# Altium PCB Hot_Water_Dispensar.PcbDoc
Units mil, origin at the board's own origin, x right, y up, seen from the top; angles counter-clockwise.
Board outline 5905.51 x 7480.32 mil, 2 copper layers (Top Layer, Bottom Layer); 38 components, 25 nets, 170 pads, 8 vias.
Unrouted connection lines stored in the file: 4.
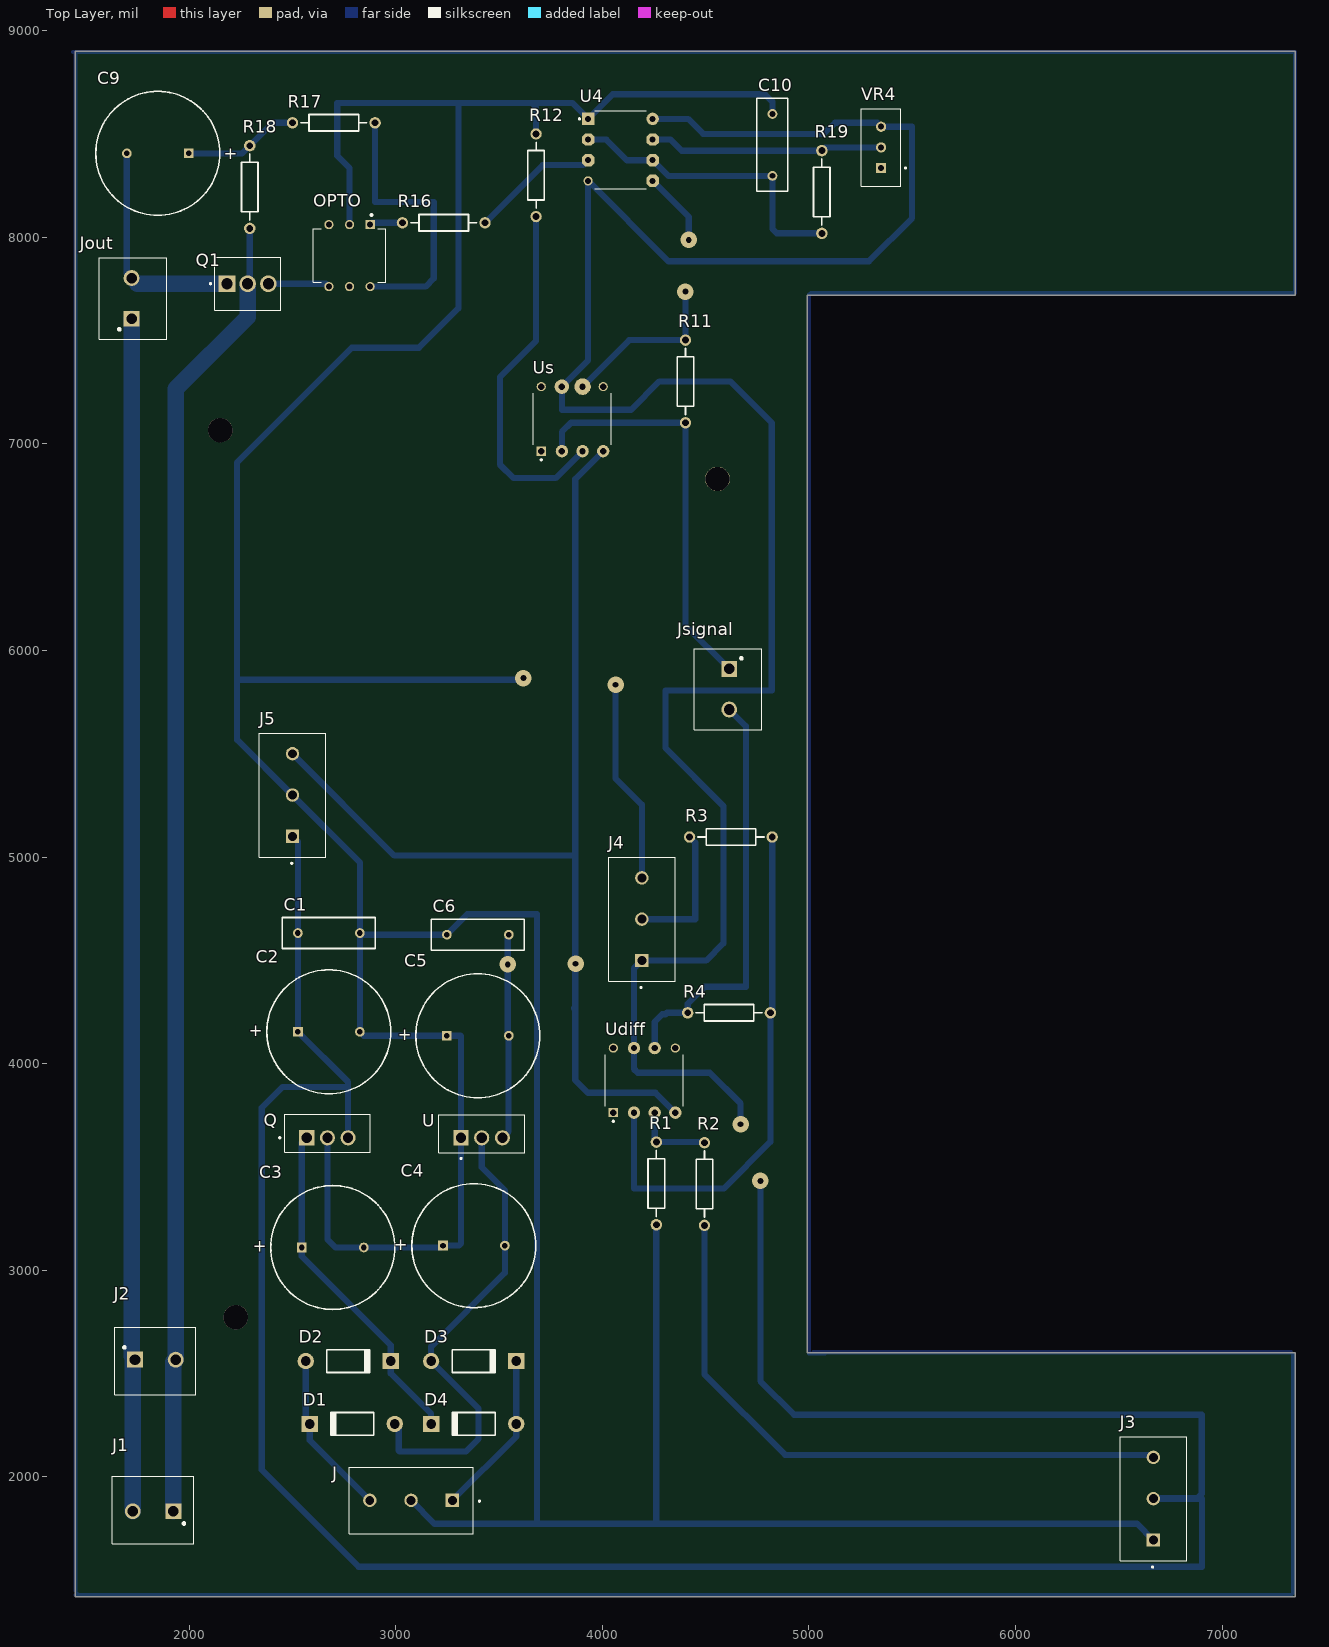
[diagram p0: Top Layer view]
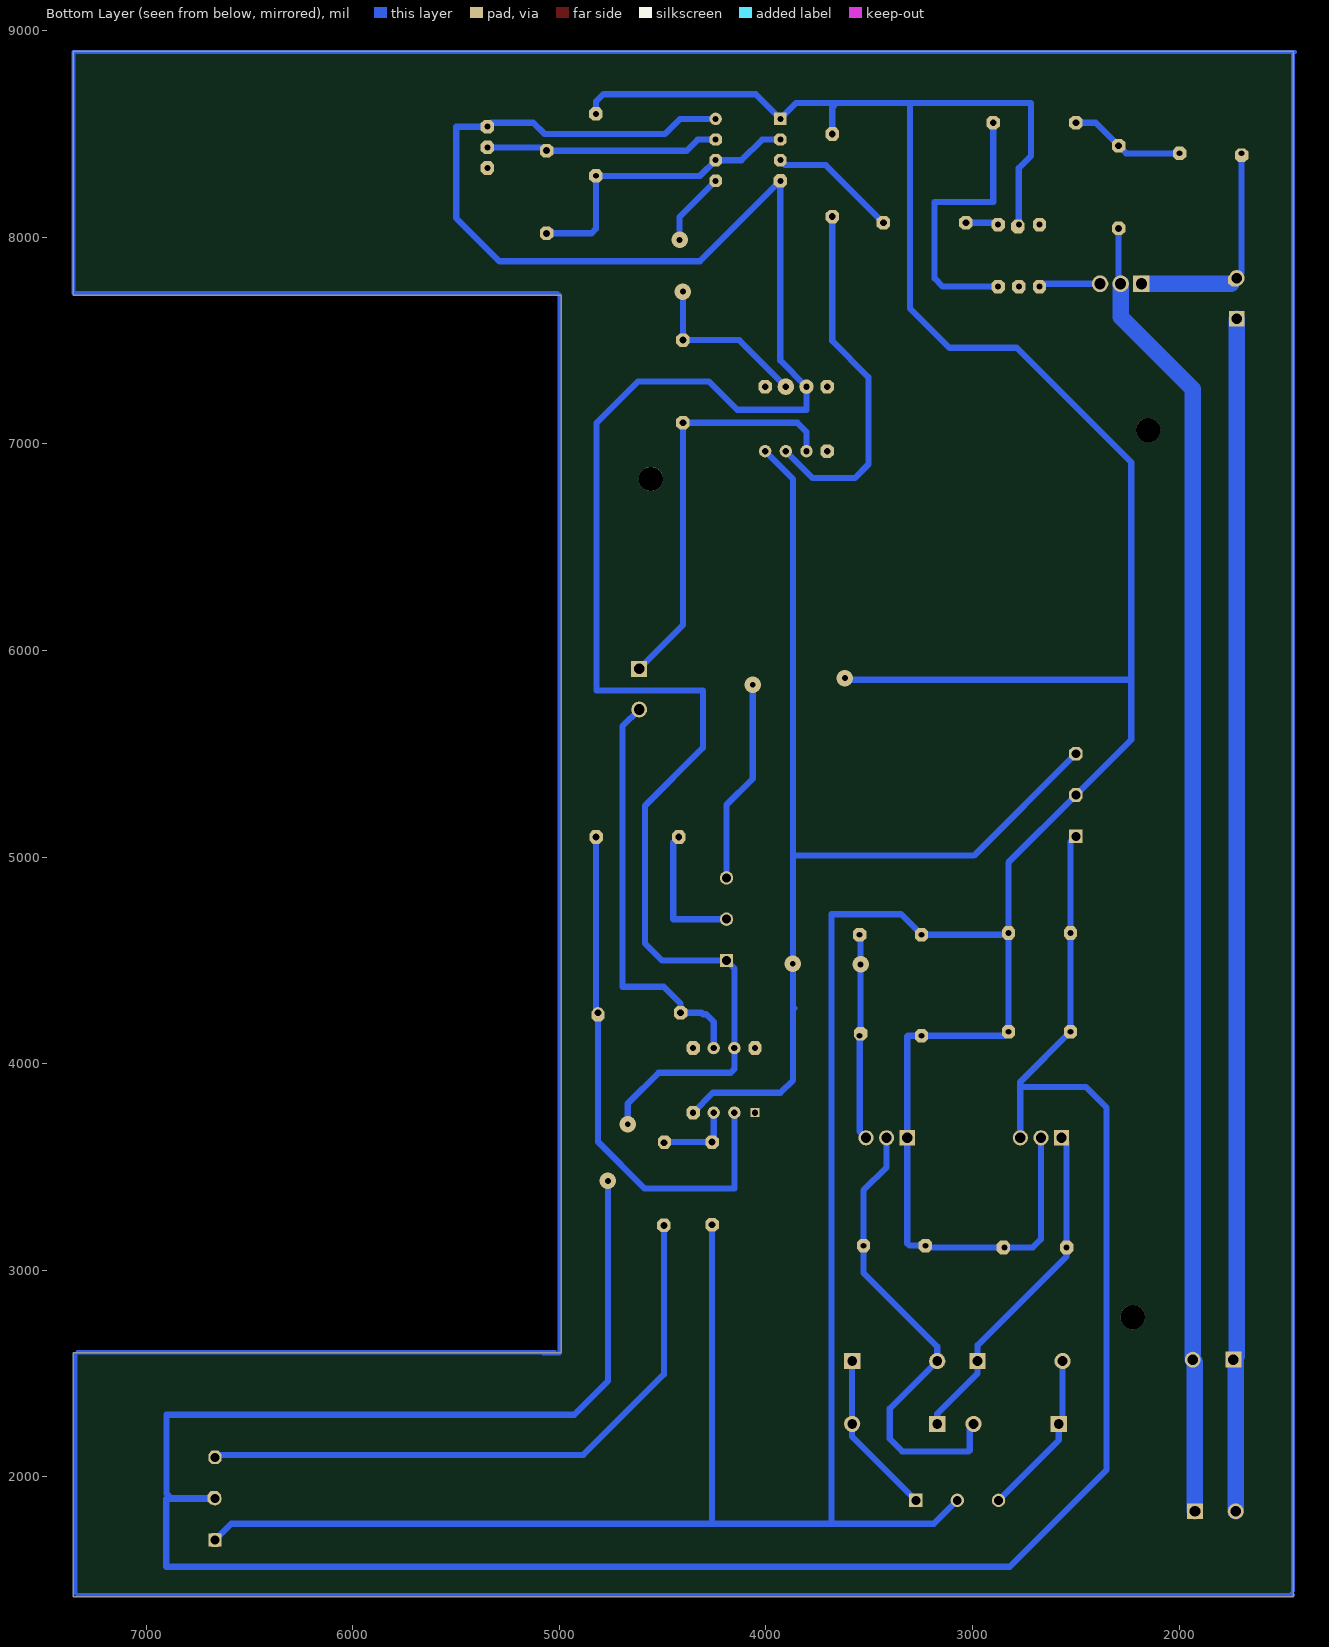
[diagram p1: Bottom Layer view, seen from below]

## Layer stack, top to bottom
Top Solder: solder mask 0.4, Solder Resist, Dk 3.5
Top Layer: signal copper 1.4
Dielectric 1: dielectric 12.6, FR-4, Dk 4.8
Bottom Layer: signal copper 1.4
Bottom Solder: solder mask 0.4, Solder Resist, Dk 3.5

## Board outline
7352.76,8900 1447.24,8900 1447.24,1419.68 7352.76,1419.68 7352.76,2600.79 4990.55,2600.79 4990.55,7718.9 7352.76,7718.9

## Design rules (kind name [scope] priority, off if disabled: settings)
Clearance [All] p1: gap=10 ignorepadtopadclearanceinfootprint=FALSE except(0: Arc-Hole Track-Hole SMDPad-Hole THPad-Hole Via-Hole Fill-Hole Poly-Hole Region-Hole Text-Hole)
PolygonConnect [All] p1: connectstyle=Relief reliefconductorwidth=10 reliefentries=4 polygonreliefangle="90 Angle" airgapwidth=10
RoutingLayers [All] p1: top layer_v5=FALSE bottom layer_v5=TRUE
RoutingVias [All] p1: holewidth=28 width=50 viastyle="Through Hole" minholewidth=28 minwidth=50 maxholewidth=28 maxwidth=50
SolderMaskExpansion [All] p1: expansion=4
Width [All] p1: maxlimit=30 minlimit=10 preferedwidth=30 toplayer_maxwidth=10 toplayer_prefwidth=10 bottomlayer_minwidth=30 minimp=50.000000 maximp=50.000000 favimp=50.000000
29 further rules are at their usual default settings.

## Components (designator, comment, footprint, x,y, rotation, side; value= is the part's Value field where it differs from the comment)
C1 "Cap" RAD-0.3 2676,4632 r0 top value=100pF
C2 "Cap Pol1" RB7.6-15 2676,4154 r180 top value=10uF
C3 "Cap Pol1" RB7.6-15 2695,3110 r180 top value=1000uF
C4 "Cap Pol1" RB7.6-15 3378,3119 r180 top value=1000uF
C5 "Cap Pol1" RB7.6-15 3397,4135 r180 top value=10uF
C6 "Cap" RAD-0.3 3397,4624 r0 top value=100pF
C9 "Cap Pol1" RB7.6-15 1848,8406 r0 top value=100pF
C10 "Cap" RAD-0.3 4823,8447 r270 top value=10uF
D1 "Diode 1N4007" DO-41 2789,2256 r180 top
D2 "Diode 1N4007" DO-41 2770,2560 r0 top
D3 "Diode 1N4007" DO-41 3377,2560 r0 top
D4 "Diode 1N4007" DO-41 3377,2256 r180 top
J "Transformer_out" TE_282837-3 3074,1886 r180 top value=3pin
J1 "AC_Connection" PHOENIX_1935161 1825,1833 r180 top
J2 "Transformer_input" PHOENIX_1935161 1836,2567 r0 top
J3 "Set_Point" TE_282837-3 6667,1894 r90 top value=3pin
J4 "Sensor_out" TE_282837-3 4191,4699 r90 top value=3pin
J5 "control out" TE_282837-3 2500,5300 r90 top value=3pin
Jout "1935161" PHOENIX_1935161 1721,7704 r90 top
Jsignal "1935161" PHOENIX_1935161 4614,5812.43 r270 top
OPTO "MOC3021" DIP762W45P254L889H508Q6 2776,7911 r270 top
Q "LM7805CT/NOPB" TO254P1054X470X2600-3 2569,3641 r0 top
Q1 "Triac" TE_282834-3 2183,7775 r0 top
R1 "Res2" AXIAL-0.4 4261,3420 r270 top value=100K
R2 "Res2" AXIAL-0.4 4494,3417 r90 top value=100K
R3 "Res2" AXIAL-0.4 4622,5097 r0 top value=100K
R4 "Res2" AXIAL-0.4 4613,4246 r180 top value=100K
R11 "Res2" AXIAL-0.4 4402,7302 r270 top value=1K
R12 "Res2" AXIAL-0.4 3679,8300 r90 top value=1K
R16 "Res2" AXIAL-0.4 3232,8070 r180 top value=1K
R17 "Res2" AXIAL-0.4 2700,8554 r0 top value=180
R18 "Res2" AXIAL-0.4 2293,8243 r90 top value=2.4K
R19 "Res2" AXIAL-0.4 5062,8219 r90 top value=1K
U "LM7905CT/NOPB" TO254P1054X470X1955-3 3416,3641 r0 top
U4 "LM555CN/NOPB" DIP794W45P254L959H508Q8#1 4087,8423 r0 top
Udiff "UA741CP" DIP794W45P254L959H508Q8#2 4203,3919 r90 top
Us "UA741CP" DIP794W45P254L959H508Q8#3 3854,7120.7 r90 top
VR4 "VR4" TRIM_3296W-1-100 5349,8435 r180 top

## Footprints (in the part's own frame and the unit in brackets; to place one, negate y for a bottom-side part, rotate by r counter-clockwise, add the part's x,y. Pads: shape width x height; smd on the part's side, far side on the other; paste and mask are expansions set on the pad)
AXIAL-0.4 [mm] "Axial Device, Thru-Hole; 2 Leads; 0.4 in Pin Spacing"
  round 1.4 hole 0.85: 1(-5.08,0) 2(5.08,0)
  silkscreen extent -4.06,-1.02 4.06,1.02
DIP762W45P254L889H508Q6 [mm]
  rect 1.13x1.13 hole 0.73: 1(-3.81,2.54)
  round 1.13 hole 0.73: 2(-3.81,0) 3(-3.81,-2.54) 4(3.81,-2.54) 5(3.81,0) 6(3.81,2.54)
  silkscreen extent -5.12,-4.45 3.3,4.45
DIP794W45P254L959H508Q8#1 [mil]
  rect 60x60 hole 29.13: 1(-156.3,150)
  oct 60x60 hole 29.13: 2(-156.3,50) 3(-156.3,-50) 5(156.3,-150) 6(156.3,-50) 7(156.3,50)
  round 44.49 hole 29.13: 4(-156.3,-150)
  round 60 hole 29.13: 8(156.3,150)
  silkscreen extent -202,-189 125,189
DIP794W45P254L959H508Q8#2 [mil]
  rect 44.49x44.49 hole 30.71: 1(-156.3,150)
  round 60 hole 30.71: 2(-156.3,50) 3(-156.3,-50) 4(-156.3,-150) 6(156.3,-50) 7(156.3,50)
  round 44.49 hole 30.71: 5(156.3,-150) 8(156.3,150)
  silkscreen extent -202,-189 125,189
DIP794W45P254L959H508Q8#3 [mil]
  rect 44.49x44.49 hole 30.71: 1(-156.3,150)
  round 60 hole 30.71: 2(-156.3,50) 3(-156.3,-50) 4(-156.3,-150)
  round 44.49 hole 30.71: 5(156.3,-150) 8(156.3,150)
  round 80 hole 30.71: 6(156.3,-50)
  round 70 hole 30.71: 7(156.3,50)
  silkscreen extent -202,-189 125,189
DO-41 [mm] "Diode, Axial; Body 5.2 x 2.7 mm (LxDia. max), Lead Dia. 0.86 mm (max)"
  round 2 hole 1.2: 1(-5.23,0)
  rect 2x2 hole 1.2: 2(5.23,0)
  silkscreen extent -2.65,-1.4 2.75,1.4
PHOENIX_1935161 [mm]
  rect 1.95x1.95 hole 1.3: 1(-2.5,0)
  round 1.95 hole 1.3: 2(2.5,0)
  silkscreen extent -5,-4.3 5,4
RAD-0.3 [mm] "Radial Cap, Thru-Hole; 2 Leads; 0.3 in Pin Spacing"
  round 1.2 hole 0.7: 1(-3.81,0) 2(3.81,0)
  silkscreen extent -5.71,-1.91 5.71,1.91
RB7.6-15 [mm] "Polarized Capacitor (Radial); 2 Leads"
  rect 1.2x1.2 hole 0.7: 1(3.81,0)
  round 1.2 hole 0.7: 2(-3.81,0)
  silkscreen extent -7.62,-7.62 7.62,7.62
TE_282834-3 [mm]
  rect 2.04x2.04 hole 1.36: 1(0,0)
  round 2.04 hole 1.36: 2(2.54,0) 3(5.08,0)
  silkscreen extent -2.13,-3.25 6.58,3.25
TE_282837-3 [mm]
  rect 1.65x1.65 hole 1.1: 1(-5.08,0)
  round 1.65 hole 1.1: 2(0,0) 3(5.08,0)
  silkscreen extent -8.5,-4.1 7.62,4.1
TO254P1054X470X1955-3 [mm]
  rect 1.86x1.86 hole 1.24: 1(-2.54,0)
  round 1.86 hole 1.24: 2(0,0) 3(2.54,0)
  silkscreen extent -5.27,-2.64 5.27,2.86
TO254P1054X470X2600-3 [mm]
  rect 1.86x1.86 hole 1.24: 1(0,0)
  round 1.86 hole 1.24: 2(2.54,0) 3(5.08,0)
  silkscreen extent -3.41,-1.8 7.81,2.9
TRIM_3296W-1-100 [mm]
  rect 1.248x1.248 hole 0.74: 1(0,2.54)
  round 1.248 hole 0.74: 2(0,0) 3(0,-2.54)
  silkscreen extent -3.1,-4.76 2.42,4.76

## Part data
C1 C6 C10: "Capacitor", LatestRevisionDate=17-Jul-2002, LatestRevisionNote="Re-released for DXP Platform.", PackageDescription="Radial Cap, Thru-Hole; 2 Leads; 0.3 in Pin Spacing", PackageReference=RAD-0.3, Published=8-Jun-2000, Publisher="Altium Limited"
C2 C3 C4 C5 C9: "Polarized Capacitor (Radial)", LatestRevisionDate=17-Jul-2002, LatestRevisionNote="Re-released for DXP Platform.", PackageDescription="Polarized Capacitor (Radial); 2 Leads", PackageReference=RB7.6-15, Published=8-Jun-2000, Publisher="Altium Limited"
D1 D2 D3 D4: "1 Amp General Purpose Rectifier", Code_JEDEC=DO-204-AL, ComponentLink1Description="Manufacturer Link", ComponentLink1URL=http://www.fairchildsemi.com/, ComponentLink2Description=Datasheet, ComponentLink2URL=http://www.fairchildsemi.com/ds/1N%2F1N4001.pdf, DatasheetVersion=1998, LatestRevisionDate=17-Jul-2002, LatestRevisionNote="Re-released for DXP Platform.", PackageDescription="Diode, Axial; Body 5.2 x 2.7 mm (LxDia. max), Lead Dia. 0.86 mm (max)", PackageReference=DO-41, PackageVersion=Aug-1999, Published=8-Jun-2000, Publisher="Altium Limited"
J J3 J4 J5: library part 282837-3, "Wire to Board 3 Position 5.08 mm Pitch 30-16 AWG Euro Style Terminal Block", Package=None, Digi-Key_Part_Number=A113321-ND, Digi-Key_Purchase_URL=https://www.digikey.in/product-detail/en/te-connectivity-amp-connectors/282837-3/A113321-ND/2187974?utm_source=snapeda&utm_medium=aggregator&utm_campaign=symbol, MF="TE Connectivity", MP=282837-3, SnapEDA_Link=https://www.snapeda.com/parts/282837-3/TE%20Connectivity%20AMP%20Connectors/view-part/2765182/?ref=snap, TE_purchase_URL=https://www.te.com/usa-en/product-282837-3.html?te_bu=Cor&te_type=disp&te_campaign=seda_glo_cor-seda-global-disp-prtnr-fy19-seda-model-bom-cta_sma-317_1&elqCampaignId=32493
J1 J2: library part 1935161, "2 Position Wire to Board Terminal Block Horizontal with Board 0.197 _5.00mm_ Through Hole", Package=None, Digi-Key_Part_Number=277-1667-ND, Digi-Key_Purchase_URL=https://www.digikey.ca/product-detail/en/phoenix-contact/1935161/277-1667-ND/568614?utm_source=snapeda&utm_medium=aggregator&utm_campaign=symbol, MF="Phoenix Contact", MP=1935161, SnapEDA_Link=https://www.snapeda.com/parts/1935161/Phoenix%20Contact/view-part/423515/?ref=snap
Jout Jsignal: "2 Position Wire to Board Terminal Block Horizontal with Board 0.197 _5.00mm_ Through Hole", Package=None, Digi-Key_Part_Number=277-1667-ND, Digi-Key_Purchase_URL=https://www.digikey.ca/product-detail/en/phoenix-contact/1935161/277-1667-ND/568614?utm_source=snapeda&utm_medium=aggregator&utm_campaign=symbol, MF="Phoenix Contact", MP=1935161, SnapEDA_Link=https://www.snapeda.com/parts/1935161/Phoenix%20Contact/view-part/423515/?ref=snap
OPTO: "Optoisolator Triac Output 5000Vrms 1 Channel 6-DIP", Package="DIP-6 Lite-On", Availability=Unavailable, MF=Lite-On, MP=MOC3021, Price=None, SnapEDA_Link=https://www.snapeda.com/parts/MOC3021/Lite-On/view-part/4551083/?ref=snap
Q: "Linear Voltage Regulator IC 1 Output 1A TO-220-3", Package="TO-220 ON Semiconductor", Availability=Unavailable, MF="ON Semiconductor", MP=LM7805CT, Price=None, SnapEDA_Link=https://www.snapeda.com/parts/LM7805CT/ON%20Semiconductor/view-part/546231/?ref=snap
Q1: "Silicon Bidirectional Triode Thyristor", ComponentLink1Description="Manufacturer Link", ComponentLink1URL=http://www.motorola.com/, DatasheetVersion=1999, LatestRevisionDate=17-Jul-2002, LatestRevisionNote="Re-released for DXP Platform.", Note="Pin 2 is electrically connected to Pin 4 (TAB)", PackageDescription="TO, Thru-Hole, Vertical, Heatsink Mounted; 3 In-Line Leads; Pitch 2.28 mm", PackageReference=369-03, Published=29-Sep-2000, Publisher="Altium Limited"
R1 R2 R3 R4 R11 R12 R16 R17 R18 R19: "Resistor", LatestRevisionDate=17-Jul-2002, LatestRevisionNote="Re-released for DXP Platform.", PackageDescription="Axial Device, Thru-Hole; 2 Leads; 0.4 in Pin Spacing", PackageReference=AXIAL-0.4, Published=8-Jun-2000, Publisher="Altium Limited"
U: "1.5-A, negative linear voltage regulator 3-TO-220 0 to 125", Package="TO-220-3 Texas Instruments", Availability=Unavailable, DigiKey-Purchase-URL=https://snapeda.com/shop?store=DigiKey&id=6864, MF="Texas Instruments", Mouser-Purchase-URL=https://snapeda.com/shop?store=Mouser&id=6864, MP=LM7905CT/NOPB, Price=None, SnapEDA_Link=https://www.snapeda.com/parts/LM7905CT/NOPB/Texas%20Instruments/view-part/6864/?ref=snap, Texas_Instruments-Purchase-URL=https://snapeda.com/shop?store=Texas+Instruments&id=6864
U4: Package=None, Availability=Unavailable, MP=LM555CN/NOPB, Price=None
Udiff Us: "General-Purpose Operational Amplifier", Package="PDIP-8 Texas Instruments", Availability=Unavailable, MF="Texas Instruments", MP=UA741CP, Price=None, SnapEDA_Link=https://www.snapeda.com/parts/UA741CP/Texas%20Instruments/view-part/50768/?ref=snap, Texas_Instruments-Purchase-URL=https://snapeda.com/shop?store=Texas+Instruments&id=50768
VR4: library part 3296W-1-100, "10 Ohms 0.5W, 1/2W PC Pins Through Hole Trimmer Potentiometer Cermet 25 Turn Top Adjustment", Package="SOT-23-5 Bourns", Digi-Key_Part_Number=3296W-100LF-ND, MF=Bourns, Mouser-Purchase-URL=https://snapeda.com/shop?store=Mouser&id=1463245, MP=3296W-1-100, SnapEDA_Link=https://www.snapeda.com/parts/3296W-1-100/Bourns/view-part/1463245/?ref=snap

## Free pads (board coordinates)
  round 118.11 hole 118.11: 1(2150.21,7066.35) 1(2225.21,2772.65) 1(4557,6830)
  oct 65x66 smd far side: 2(5349,8535) 3(5349,8435) 4(5349,8335) 5(4823,8597) 6(4823,8297) 7(5062,8019) 8(5062,8419) 9(2876,7761) 10(2676,7761) 11(2781,8052) 12(2876,8061) 13(2293,8043) 14(2293,8443) 15(2500,8554) 16(2900,8554) 17(3679,8100) 18(3432,8070) 19(3032,8070) 20(3679,8500) 21(4402,7102) 22(4402,7502) 23(4422,5097) 24(4822,5097) 25(4413,4246) 26(4813,4236) 27(3247,4135) 28(3542,4145) 29(2826,4632) 30(3247,4624) 31(3547,4624) 32(2826,4154) 33(2526,4154) 34(2526,4632) 35(2500,5100) 36(2500,5300) 37(2500,5500) 38(3704,7277) 39(3704,6964.4) 40(4004,7277) 41(3228,3119) 42(3528,3119) 43(2851,3110) 44(2545,3110) 45(4494,3217) 46(4261,3220) 47(4353,3762.7) 48(4261,3620) 49(4491,3620) 50(4053,4075.3) 51(4353,4075.3) 52(6671,1898) 53(6667,2094) 54(6667,1694) 55(1698,8397) 56(1998,8406) 57(1730,7793.43) 58(1721,7605.57) 59(2283,7775) 60(2676,8061) 61(2776,7761) 62(3930.7,8273)

## Via types
v1: diameter 80, hole 28, Top Layer to Bottom Layer, 8 vias

## Nets (pads, with @x,y where several pads share a name; then routed paths per layer and width w, separated by ;. In a path a pad name is that pad's centre, name@x,y a point inside that pad or via, vN(x,y) a via of type N, cw(c..) or ccw(c..) an arc to the next point about the centre after c; other vN are vias at no path point)
GND: C1.2 C2.2 C3.2 C4.1 C5.1 C6.1 C10.1 J3.1 J4.3 J5.2 J.2 OPTO.2 pad.5 pad.11 pad.20 pad.27 pad.29 pad.30 pad.32 pad.36 pad.41 pad.43 pad.46 pad.54 Q.2 R1.2 R12.2 U4.1 U.1 | length 22420.5
  Bottom Layer w30: Q.2 2669,3149 2708,3110 C3.2 pad.43 3219,3110 C4.1 3305,3119 3316,3130 U.1 3316,4132 3313,4135 C5.1 2845,4135 C2.2 C1.2 ; OPTO.2 2776,8335 2717,8394 2717,8650 3303,8650 ; J.2 3187,1773 3683,1773 ; v1@3610,5858 2232,5858 ; R12.2 3679,8628 3657,8650 ; 3933,1774 3934,1773 ; v1@4064,5842 v1(4064,5834) 4064,5380 4191,5253 J4.3 ; R1.2 4261,1774 4260,1773 ; C10.1 4823,8656 4787,8692 4049.7,8692 U4.1 3853.7,8650 3657,8650 ; J3.1 6588,1773 4260,1773 ; 2232,5858 2232,5568 J5.2 2826,4974 C1.2 ; 2232,5858 2232,6910 2787,7465 3112,7465 3303,7656 3303,8650 ; C1.2 2834,4624 C6.1 3346,4723 3683,4723 3683,1773 ; 3303,8650 3657,8650 ; 3683,1773 3934,1773 ; 3934,1773 4260,1773
  other v1: 3618,5866
LIVE: J1.1 J2.2 pad.13 pad.59 Q1.2 R18.1 | length 6363.1
  Bottom Layer w30: J2.2@1923.42,2556 J2.2 ; Q1.2 2293,7785 R18.1
  Bottom Layer w80: J1.1 J2.2@1923.42,2556 ; J2.2 1934.43,7265.43 2283,7614 Q1.2
NetC3_1: C3.1 D2.2 D4.2 pad.44 Q.1 | length 1654.3
  Bottom Layer w30: Q.1 2545,3617 C3.1 2545,3068 2975.91,2637.09 D2.2 2975.91,2500.09 3171.09,2304.91 D4.2
NetC4_2: C4.2 D1.1 D3.1 pad.42 U.2 | length 2296.7
  Bottom Layer w30: D1.1 3014,2236.91 3014,2128 3019,2123 3340,2123 3401,2184 3401,2330.09 D3.1 3171.09,2630.09 3528,2987 C4.2 3528,3386 3416,3498 U.2
NetC9_1: C9.1 pad.14 pad.15 pad.56 R17.1 R18.2 | length 563.3
  Bottom Layer w30: C9.1 2256,8406 R18.2 2404,8554 R17.1
NetC9_2: C9.2 Jout.2 pad.55 pad.57 Q1.1 | length 1086.5
  Bottom Layer w30: C9.2 pad.55 1698,7825.43 Jout.2 pad.57 pad.57@1748.43,7775
  Bottom Layer w80: pad.57@1748.43,7775 Q1.1
NetC10_2: C10.2 pad.6 pad.7 R19.1 U4.2 U4.6 | length 1469.9
  Bottom Layer w30: U4.2 4019,8473 4119,8373 U4.6 4319.3,8297 C10.2 4823,8040 4844,8019 R19.1
NetD1_2: D1.2 D2.1 J.3 | length 802.4
  Bottom Layer w30: D2.1 2564.09,2275 D1.2 2583.09,2176.91 J.3
NetD3_2: D3.2 D4.1 J.1 | length 802
  Bottom Layer w30: J.1 3582.91,2194.91 D4.1 D3.2
NetJ3_3: J3.3 pad.45 pad.53 R2.1 | length 3067.5
  Bottom Layer w30: R2.1 4494,2496 4884,2106 6667,2106 J3.3
NetJ4_2: J4.2 pad.23 R3.1 | length 667.2
  Bottom Layer w30: J4.2 4449,4699 4449,5070 R3.1
NetJsignal_1: Jsignal.1 pad.21 R11.2 Us.2 | length 1988.8
  Bottom Layer w30: Us.2 3804,7058 3848,7102 R11.2 4402,6122.85 Jsignal.1
NetJsignal_2: Jsignal.2 pad.25 R4.2 Udiff.6 | length 2040.4
  Bottom Layer w30: Udiff.6 4253,4202 4290,4239 4305,4239 4312,4246 R4.2 4413,4290 4495,4372 4695,4372 4695,5633 Jsignal.2
NetOPTO_1: OPTO.1 pad.12 pad.19 R16.2 | length 159.7
  Bottom Layer w30: OPTO.1 2885,8070 R16.2
NetOPTO_4: OPTO.4 pad.10 Q1.3 | length 298.8
  Bottom Layer w30: Q1.3 2662,7775 OPTO.4
NetOPTO_6: OPTO.6 pad.9 pad.16 R17.2 | length 1361.6
  Bottom Layer w30: OPTO.6 3144,7761 3184,7801 3184,8170 2900,8170 R17.2
NetR1_1: pad.48 pad.49 R1.1 R2.2 Udiff.3 | length 380.3
  Bottom Layer w30: Udiff.3 4253,3628 R1.1 pad.49 R2.2
NetR3_2: pad.24 pad.26 R3.2 R4.1 Udiff.2 | length 2601
  Bottom Layer w30: Udiff.2 4153,3395 4587,3395 4813,3621 pad.26 R4.1 4822,4255 R3.2
NetR12_1: pad.17 R12.1 Us.3 | length 1753.8
  Bottom Layer w30: R12.1 3679,7498 3504,7323 3504,6900 3570,6834 3773.6,6834 Us.3
NetR16_1: pad.18 R16.1 U4.3 | length 624.2
  Bottom Layer w30: R16.1 3711,8349 3906.7,8349 U4.3
NetR19_2: pad.3 pad.8 R19.2 U4.7 VR4.2 | length 1134.7
  Bottom Layer w30: U4.7 4330,8473 4384,8419 R19.2 5078,8435 VR4.2
NEUTRAL: J1.2 J2.1 Jout.1 pad.58 | length 5784
  Bottom Layer w30: J2.1@1721,2583.57 J2.1 J2.1@1726.57,2556
  Bottom Layer w80: J2.1@1721,2583.57 Jout.1 ; J1.2 J2.1@1726.57,2556
PID_OUT: pad.22 R11.1 U4.5 Us.6 | length 1163.6
  Bottom Layer w30: Us.6 4129,7502 R11.1 v1(4402,7737) ; U4.5 4418,8098.3 v1@4418,8008
  other v1: 4418,7987
VCC+: C1.1 C2.1 J3.2 J4.1 J5.1 pad.2 pad.33 pad.34 pad.35 pad.52 pad.62 Q.3 U4.4 U4.8 Udiff.7 Us.7 VR4.3 | length 23587.7
  Bottom Layer w30: J5.1 2526,5074 C1.1 C2.1 2769,3911 2769,3887 ; Q.3 2769,3887 ; U4.8 4415,8573 4488,8500 5072,8500 5126,8554 5330,8554 VR4.3 5499,8535 5499,8093 5290,7884 4319.7,7884 U4.4 3930.7,7403.7 Us.7 3804,7165 4139,7165 4276,7302 4619,7302 4820,7101 4820,5806 4305,5806 4305,5528 4586,5247 4586,4583 4502,4499 J4.1 4153,4461 Udiff.7 4153,3974 4171,3956 4520,3956 4669,3807 v1(4669,3707) ; v1(4765,3432) 4765,2463 4928,2300 6901,2300 6901,1918 6881,1898 pad.52 J3.2 6903,1894 6903,1565 2820,1565 2351,2034 2351,3786 2452,3887 2769,3887
VCC-: C5.2 C6.2 J5.3 pad.28 pad.31 pad.37 pad.47 U.3 Udiff.4 Us.4 | length 6235.6
  Bottom Layer w30: J5.3 2993,5007 3869,5007 ; U.3 3546,3671 C5.2@3546,4135 ; C6.2@3542,4628 v1(3542,4480) pad.28 3542,4135 C5.2@3546,4135 ; C5.2 C5.2@3546,4135 ; 3863,4268 3869,4274 ; Us.4 3869,6829.4 3869,5007 ; Udiff.4 4256.7,3859 3930,3859 3869,3920 3869,4274 ; 3869,4274 3869,5007
  other v1: 3870,4483
pads on no net: OPTO.3 OPTO.5 Udiff.1 Udiff.5 Udiff.8 Us.1 Us.5 Us.8 VR4.1
copper on no net: | length 31484.3
  Bottom Layer w10: 1439,8896 1449,8886 ; 1449,1449 1470,1428 ; 7333,1428 7342,1437 ; 7333,2603 7342,2594
  Bottom Layer w20: 1439,8896 7352,8896 7352,7730 5009,7730 ; 1449,1428 7333,1428 ; 1449,1449 1449,8886 ; 5000,7723 5000,2597 5077,2597 ; 5021,2603 7333,2603 ; 7342,1437 7342,2594

## Text inside footprints (layer, text, board x,y; h text height)
C2: Top Overlay "+" at 2355.85,4183.01 h59.06 r180
C3: Top Overlay "+" at 2374.85,3139.01 h59.06 r180
C4: Top Overlay "+" at 3057.85,3148.01 h59.06 r180
C5: Top Overlay "+" at 3076.85,4164.01 h59.06 r180
C9: Top Overlay "+" at 2168.15,8376.99 h59.06
J1: Mechanical 13 "VALUE" at 2025.51,2083.63 h50.13 r180; Mechanical 13 "NAME" at 2025.28,1632.72 h50.07 r180
J2: Mechanical 13 "VALUE" at 1635.49,2316.37 h50.13; Mechanical 13 "NAME" at 1635.72,2767.28 h50.07
Jout: Mechanical 13 "VALUE" at 1971.63,7503.49 h50.13 r90; Mechanical 13 "NAME" at 1520.72,7503.72 h50.07 r90
Jsignal: Mechanical 13 "NAME" at 4814.28,6012.7 h50.07 r270; Mechanical 13 "VALUE" at 4363.37,6012.93 h50.13 r270